# Altium PCB Tostado.PcbDoc
Units mm, origin at the board's own origin, x right, y up, seen from the top; angles counter-clockwise.
Board outline 69.09 x 53.85 mm, 4 copper layers (Top Layer, GND, PWR, Bottom Layer), stack 1.56 mm thick; 33 components, 45 nets, 178 pads, 219 vias.
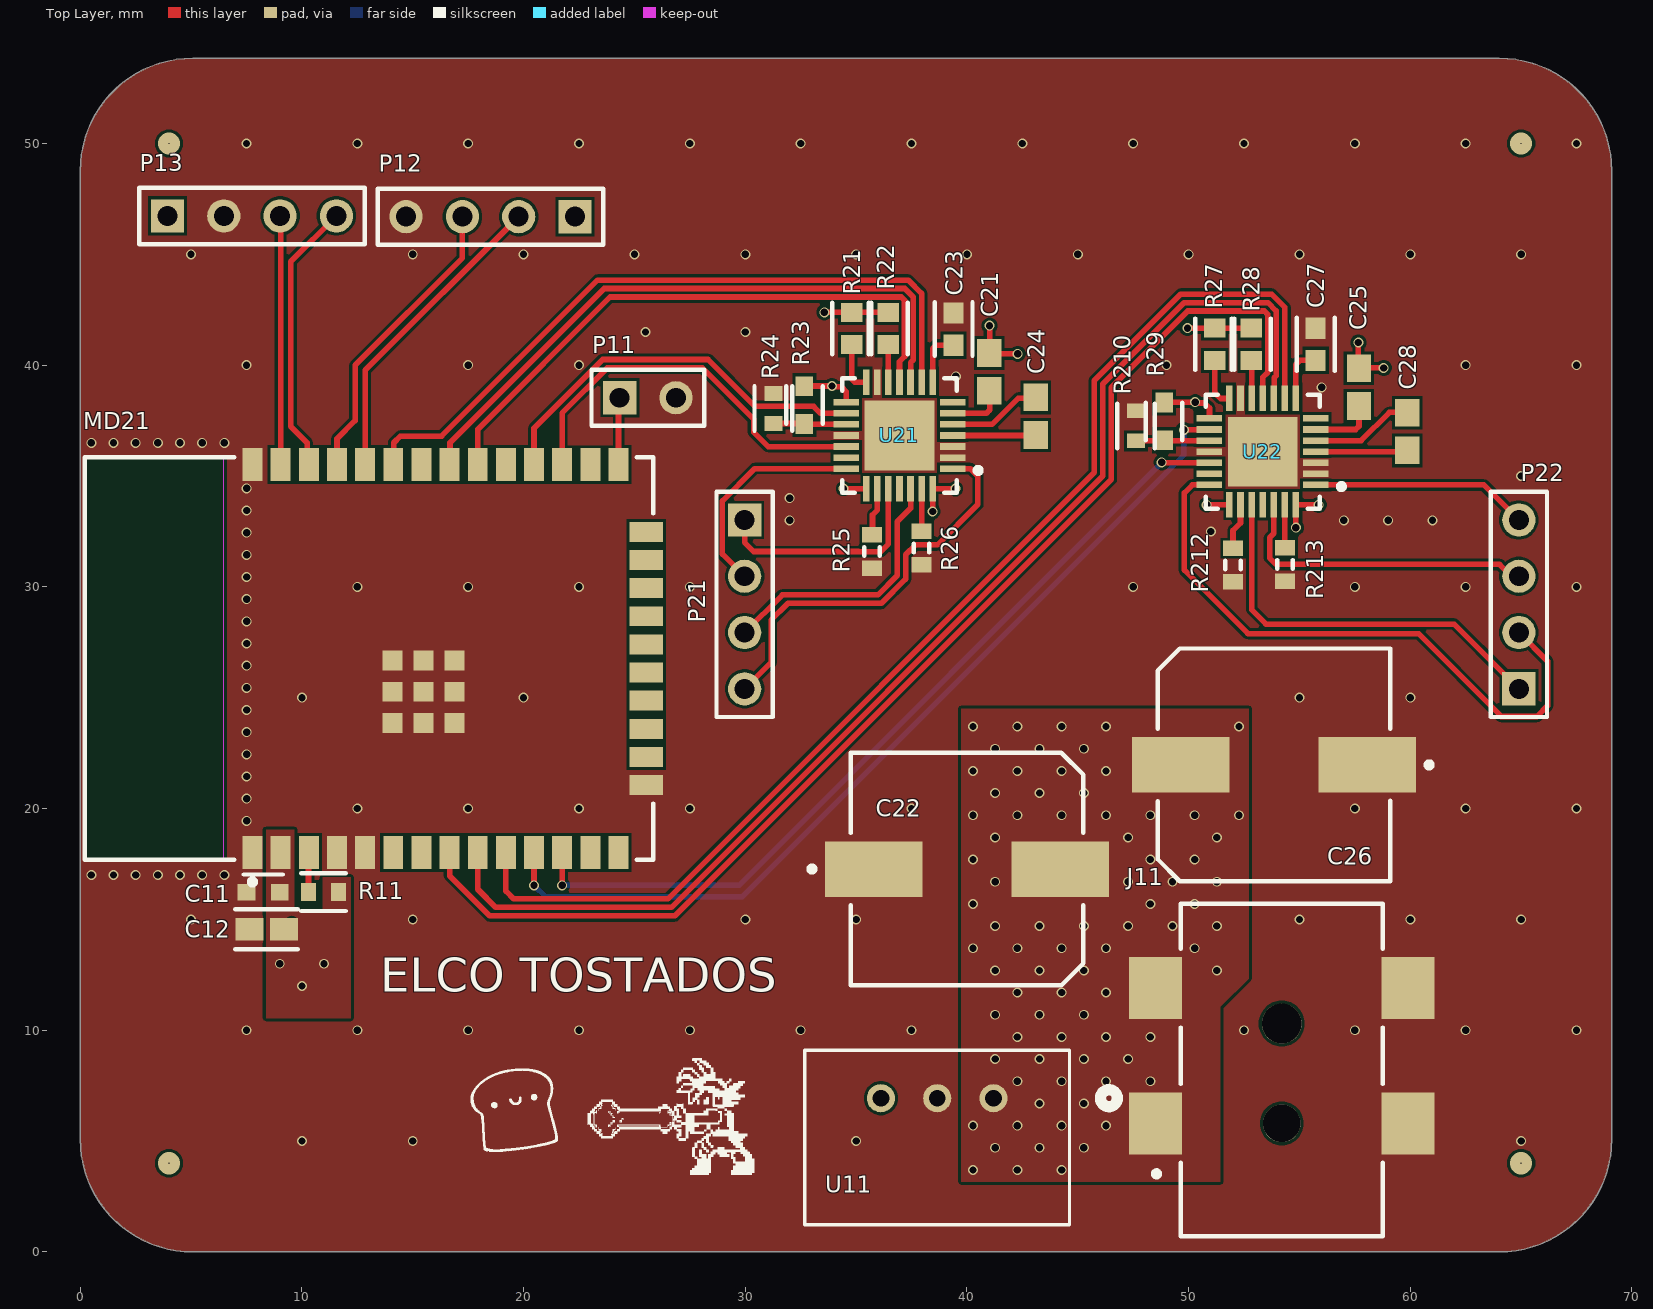
[diagram p0: Top Layer view]
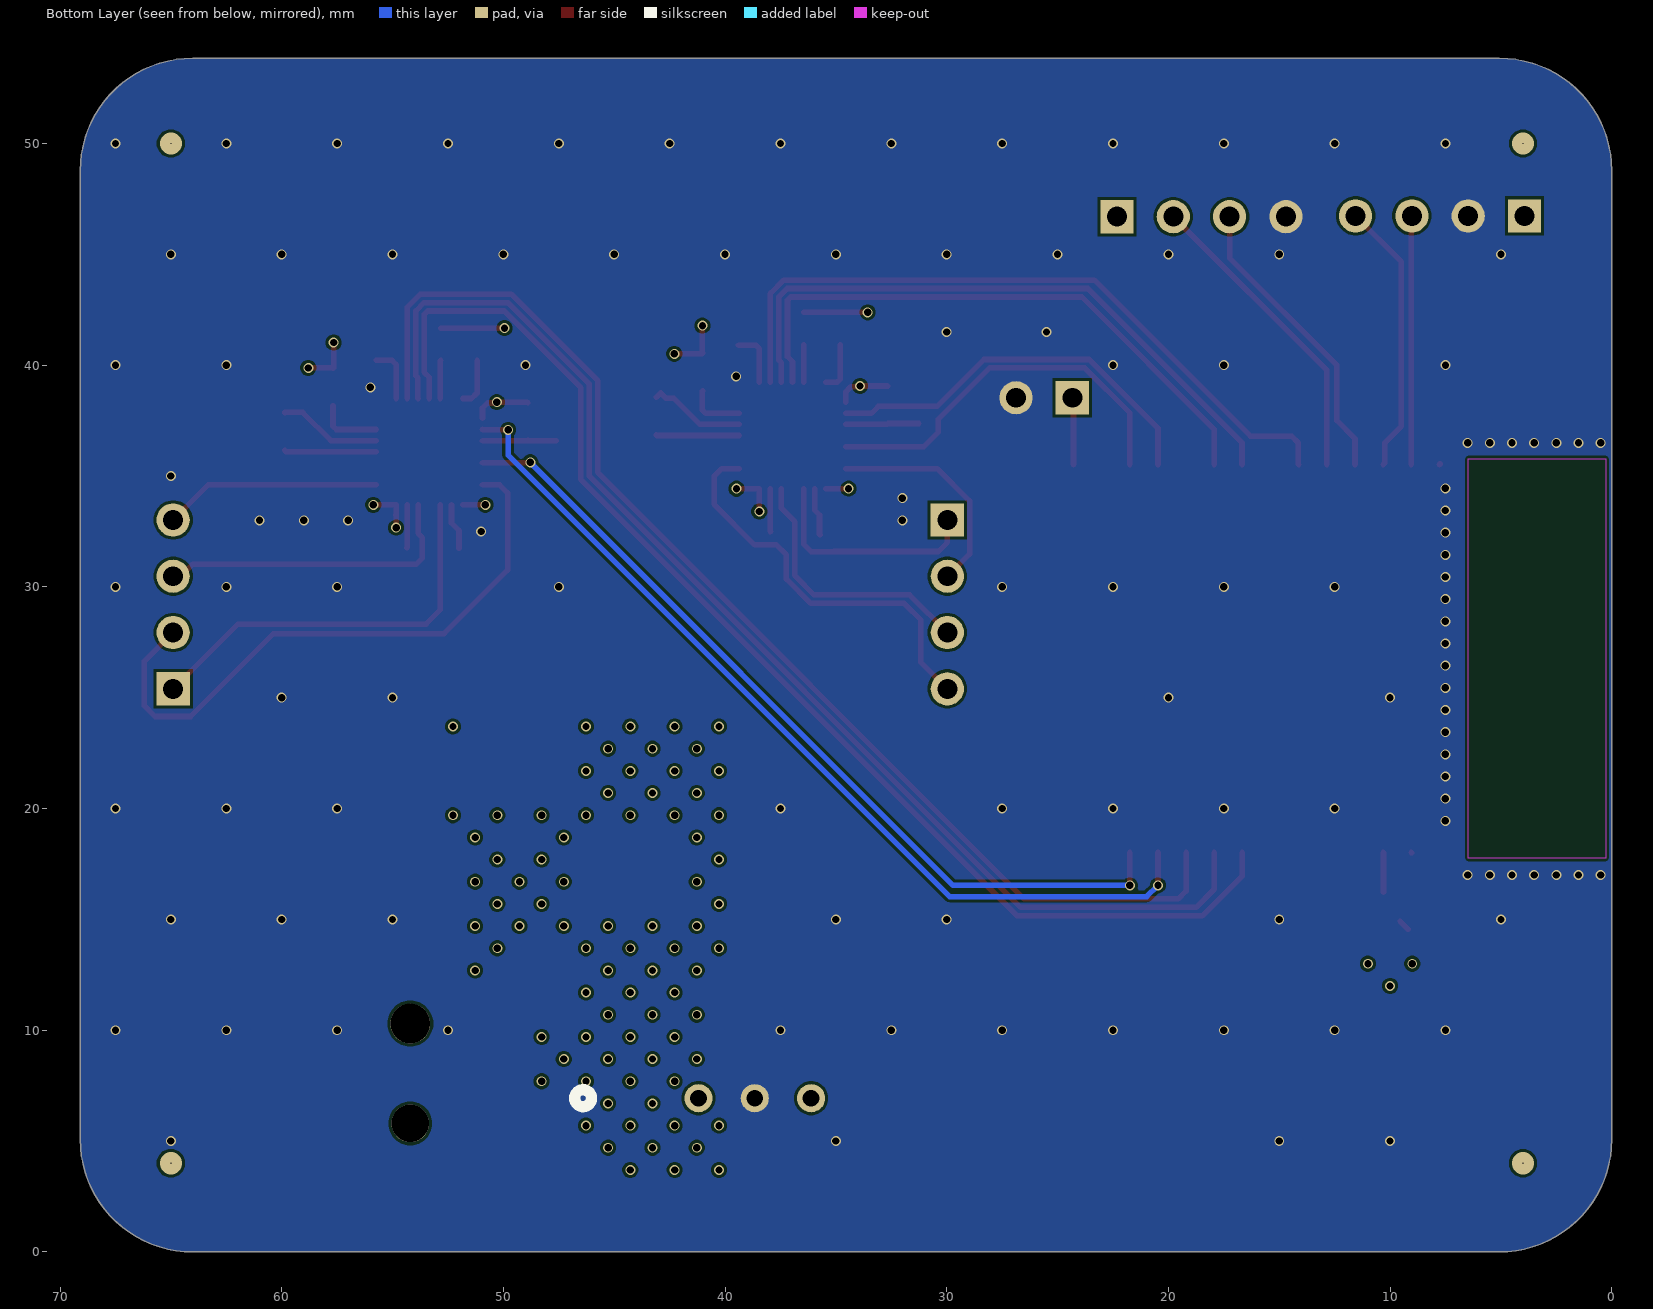
[diagram p1: Bottom Layer view, seen from below]
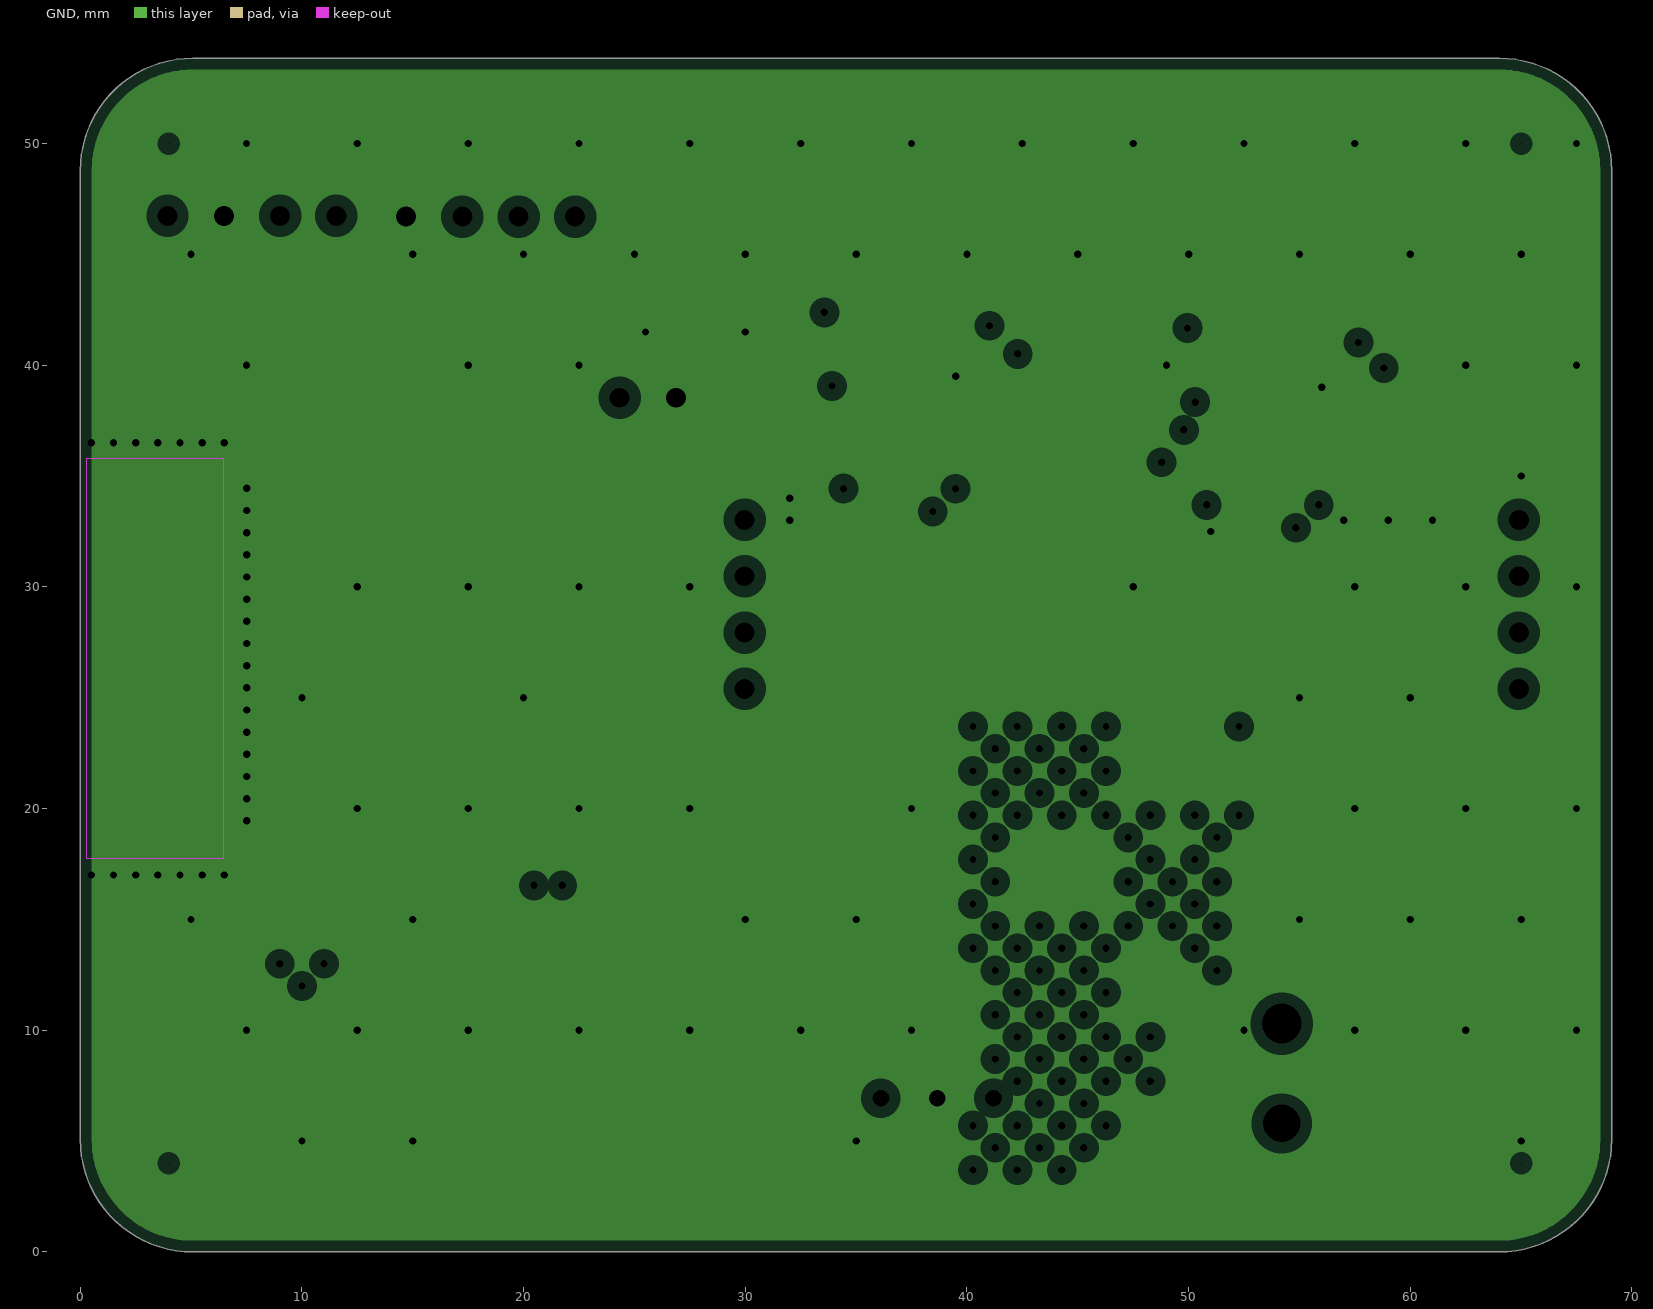
[diagram p2: GND, clearances drawn from the general rule]
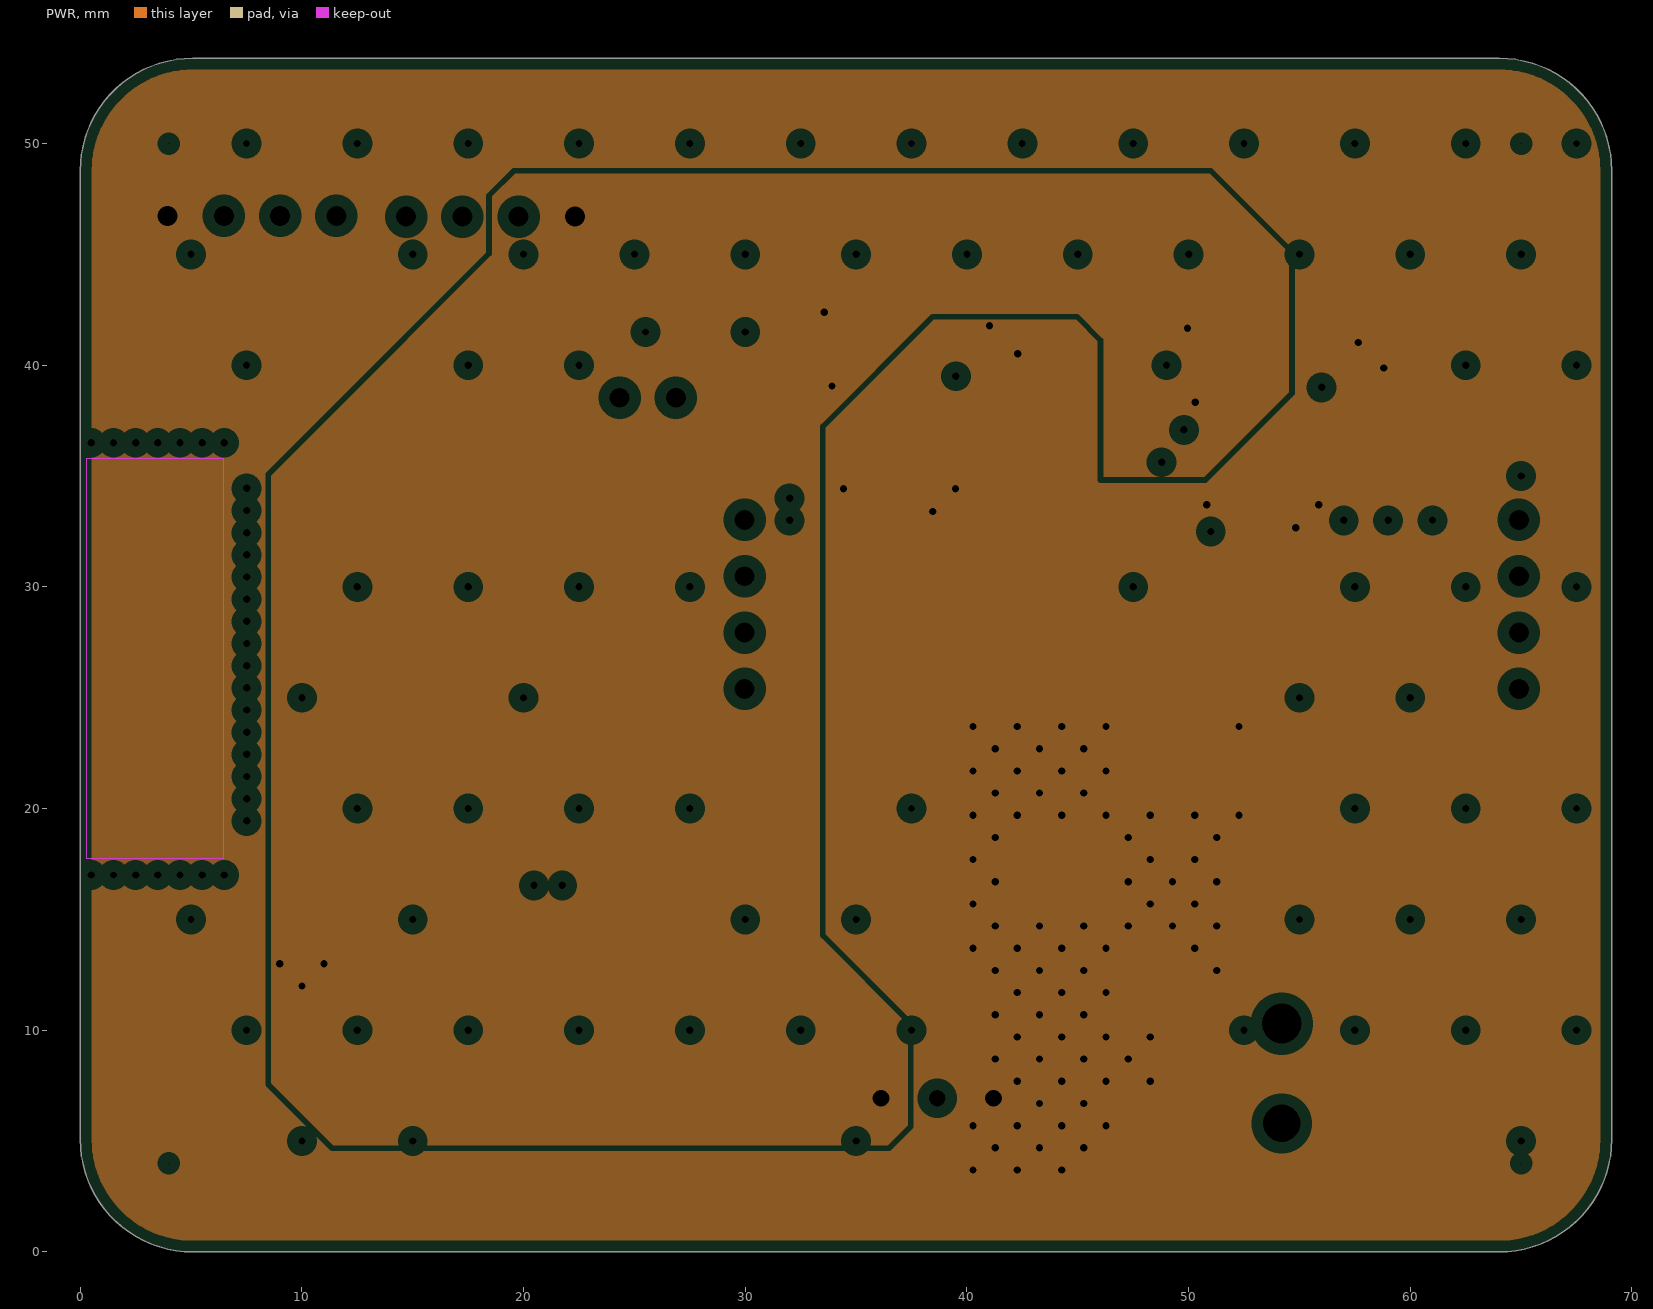
[diagram p3: PWR, clearances drawn from the general rule]
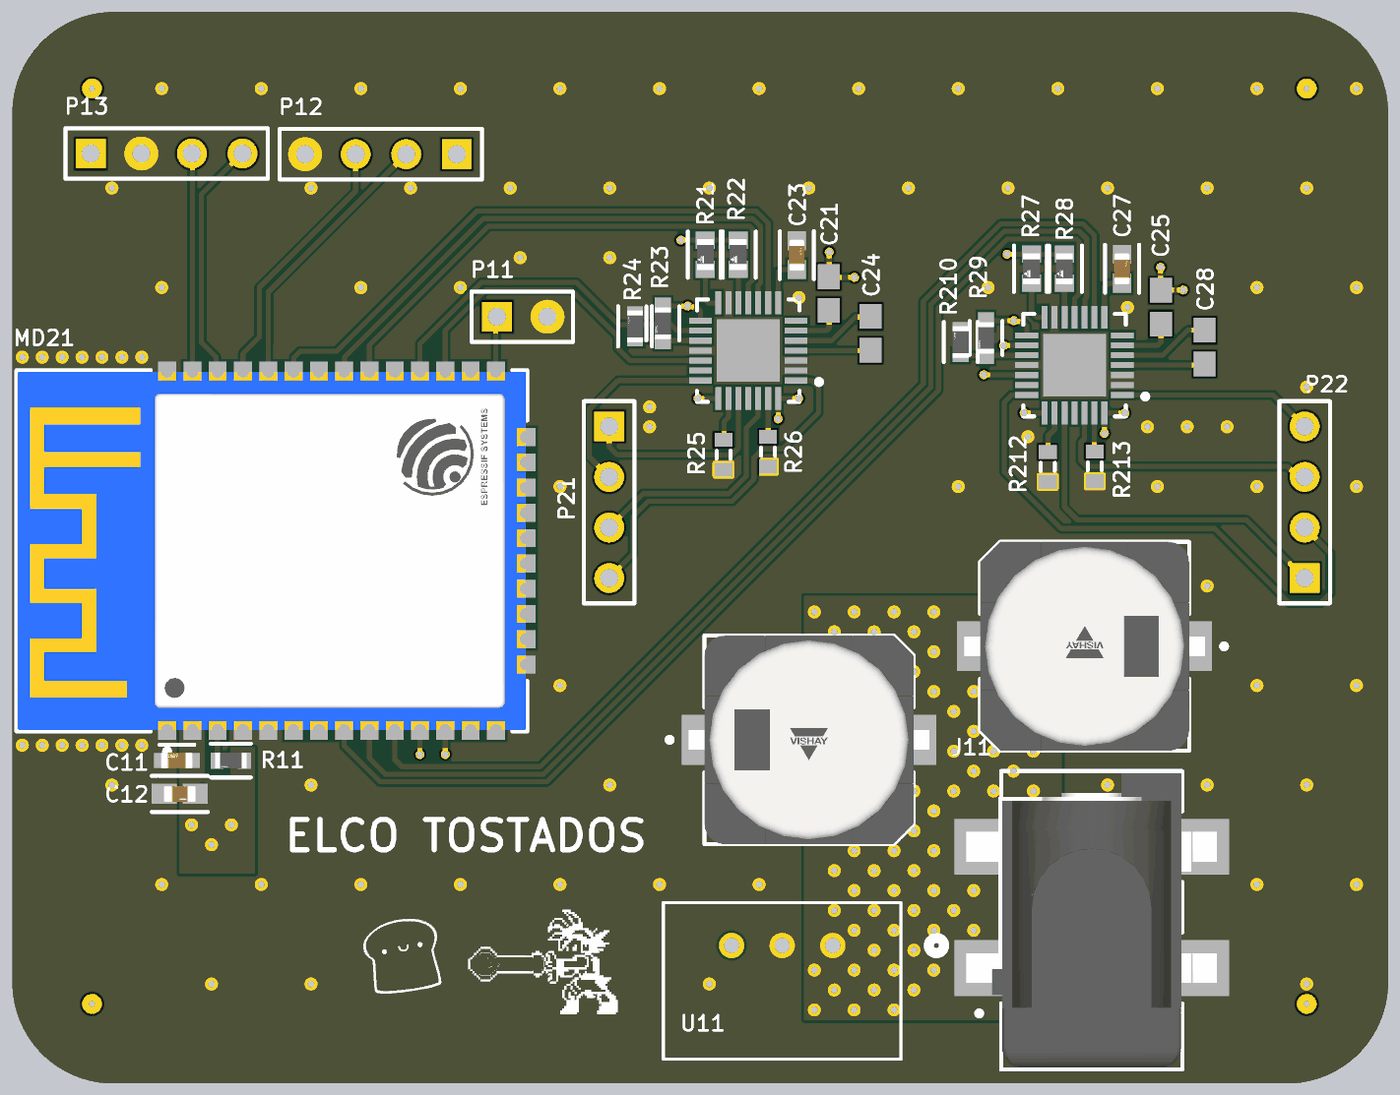
[diagram p4: 3D render of the assembled board from above, using the file's embedded part models]

## Layer stack, top to bottom
Top Solder: solder mask 0.0102, Solder Resist, Dk 3.5
Top Layer: signal copper 0.035
Dielectric 2: prepreg 0.11, PP-006, Dk 4.1
GND: plane copper 0.035, net GND
Core: core 1.2, FR-4, Dk 4.1
PWR: plane copper 0.035, net (Multiple Nets)
Dielectric 3: prepreg 0.11, PP-006, Dk 4.1
Bottom Layer: signal copper 0.035
Bottom Solder: solder mask 0.0102, Solder Resist, Dk 3.5

## Board outline
5.08,0 cw(c5.08,5.08) 0,5.08 0,48.768 cw(c5.08,48.768) 5.08,53.848 64.008,53.848 cw(c64.008,48.768) 69.088,48.768 69.088,5.08 cw(c64.008,5.08) 64.008,0

## Design rules (kind name [scope] priority, off if disabled: settings)
Clearance [All] p1: gap=0.127 ignorepadtopadclearanceinfootprint=FALSE except(0: Arc-Hole Track-Hole SMDPad-Hole THPad-Hole Via-Hole Fill-Hole Poly-Hole Region-Hole Text-Hole)
MinimumSolderMaskSliver [All] p1: minsoldermaskwidth=0.203
PlaneClearance [All] p1: clearance=0.508
PlaneConnect [All] p1: planeconnectstyle=Direct reliefexpansion=0.508 reliefentries=4 reliefconductorwidth=0.254 reliefairgap=0.254
PolygonConnect [All] p1: connectstyle=Direct reliefconductorwidth=0.254 reliefentries=4 polygonreliefangle="90 Angle" airgapwidth=0.254
RoutingVias [All] p1: holewidth=0.711 width=1.27 viastyle="Through Hole" minholewidth=0.711 minwidth=1.27 maxholewidth=0.711 maxwidth=1.27
SolderMaskExpansion [All] p1: expansion=0.102 istentingtop=FALSE
Width [All] p1: maxlimit=0.254 minlimit=0.254 preferedwidth=0.254
27 further rules are at their usual default settings.

## Classes and differential pairs
component class STEPPERS: C21 C22 C23 C24 C25 C26 C27 C28 P21 P22 R21 R22 R23 R24 R25 R26 R27 R28 R29 R210 R212 R213 U21 U22
component class "Arduino headers": C11 C12 J11 MD21 P11 P12 P13 R11 U11

## Components (designator, comment, footprint, x,y, rotation, side; value= is the part's Value field where it differs from the comment)
C11 "22uF" FP-0603-L_1_6_0_15-W_0_81-MFG 8.255,16.231 r180 top
C12 "0.1uF" FP-CC0603-DA-IPC_A 8.407,14.554 r180 top value=100nF
C21 "0.1uF" CAPC1608X90X35ML15T15 41,39.7 r90 top value=100nF
C22 "100uF" FP-MAL2150-1010-MFG 40.005,17.272 r0 top
C23 "0.22uF" FP-GCM188-0_1-IPC_B 39.395,41.631 r90 top value=220nF
C24 "0.1uF" CAPC1608X90X35ML15T15 43.1,37.7 r270 top value=100nF
C25 "0.1uF" CAPC1608X90X35ML15T15 57.683,39.014 r90 top value=100nF
C26 "100uF" FP-MAL2150-1010-MFG 53.848,21.971 r180 top
C27 "0.22uF" FP-GCM188-0_1-IPC_B 55.728,40.945 r90 top value=220nF
C28 "0.1uF" CAPC1608X90X35ML15T15 59.868,37.008 r270 top value=100nF
J11 "PJ-002BH-SMT-TR" FP-PJ-002BH-SMT-TR-MFG 54.2,8.2 r90 top
MD21 "ESP32-WROOM-32E (16MB)" FP-ESP32-WROOM-32E_16MB-MFG 13.031,26.77 r90 top
P11 "Jumper 1" HDR1X2 24.333,38.532 r0 top
P12 "UART" HDR1X4 22.32,46.7 r180 top
P13 "Laser" HDR1X4 3.937,46.736 r0 top
P21 "Motor 1" HDR1X4 29.972,33.02 r270 top
P22 "Motor 2" HDR1X4 64.897,25.4 r90 top
R11 "10k" FP-RC0603-0_55-IPC_C 10.973,16.231 r180 top value=10kR
R21 "4.7k" FP-MCT0603-IPC_B 34.798,41.656 r270 top value=4.7kR
R22 "4.7k" FP-MCT0603-IPC_B 36.449,41.656 r270 top value=4.7kR
R23 "10k" FP-AC0603-MFG 32.664,38.202 r270 top value=10kR
R24 "1k" FP-RC0603-0_55-IPC_C 31.267,38.049 r90 top value=1kR
R25 "Res3" J1-0603 35.712,31.598 r90 top value=0.1
R26 "Res3" J1-0603 37.948,31.75 r90 top value=0.1
R27 "4.7k" FP-MCT0603-IPC_B 51.181,40.945 r270 top value=4.7kR
R28 "4.7k" FP-MCT0603-IPC_B 52.832,40.945 r270 top value=4.7kR
R29 "10k" FP-AC0603-MFG 48.895,37.465 r270 top value=10kR
R210 "1k" FP-RC0603-0_55-IPC_C 47.625,37.262 r90 top value=1kR
R212 "Res3" J1-0603 51.994,30.988 r90 top value=0.1
R213 "Res3" J1-0603 54.356,31.013 r90 top value=0.1
U11 "TSR 1-2433" TSR1-SINGLE_TRP 41.199,6.934 r180 top
U21 "A4988SETTR-T" FP-ET-28-MFG 36.957,36.83 r180 top
U22 "A4988SETTR-T" FP-ET-28-MFG 53.34,36.1 r180 top

## Footprints (in the part's own frame and the unit in brackets; to place one, negate y for a bottom-side part, rotate by r counter-clockwise, add the part's x,y. Pads: shape width x height; smd on the part's side, far side on the other; paste and mask are expansions set on the pad)
CAPC1608X90X35ML15T15 [mm] "Chip Capacitor, 2-Leads, Body 1.60x0.81mm, IPC Low Density"
  rect 1.25x1.1 smd: 1(-0.85,0) 2(0.85,0)
  body extent -0.88,-0.48 0.87,0.48, height 0.9
FP-0603-L_1_6_0_15-W_0_81-MFG [mm]
  rect 0.8x0.75 smd paste+0 mask+0: 1(-0.75,0) 2(0.75,0)
  silkscreen extent -0.88,-0.79 0.87,0.77, body extent -1.25,-0.58 1.25,0.58, height 0.25
FP-AC0603-MFG [mm]
  rect 0.9x0.8 smd paste+0 mask+0: 1(-0.85,0) 2(0.85,0)
  silkscreen extent -0.85,-0.82 0.85,0.82, body extent -1.4,-0.55 1.4,0.55, height 0.25
FP-CC0603-DA-IPC_A [mm]
  rect 1.258x1.012 smd paste+0 mask+0: 1(-0.777,0) 2(0.777,0)
  silkscreen extent -1.41,-0.91 1.41,0.91, body extent -1.91,-1.01 1.91,1.01, height 0.25
FP-ESP32-WROOM-32E_16MB-MFG [mm]
  rect 1.5x0.9 smd paste+0 mask+0: 1(-8.75,5.26) 2(-8.75,3.99) 3(-8.75,2.72) 4(-8.75,1.45) 5(-8.75,0.18) 6(-8.75,-1.09) 7(-8.75,-2.36) 8(-8.75,-3.63) 9(-8.75,-4.9) 10(-8.75,-6.17) 11(-8.75,-7.44) 12(-8.75,-8.71) 13(-8.75,-9.98) 14(-8.75,-11.25) 25(8.75,-11.25) 26(8.75,-9.98) 27(8.75,-8.71) 28(8.75,-7.44) 29(8.75,-6.17) 30(8.75,-4.9) 31(8.75,-3.63) 32(8.75,-2.36) 33(8.75,-1.09) 34(8.75,0.18) 35(8.75,1.45) 36(8.75,2.72) 37(8.75,3.99) 38(8.75,5.26)
  rect 0.9x1.5 smd paste+0 mask+0: 15(-5.715,-12.5) 16(-4.445,-12.5) 17(-3.175,-12.5) 18(-1.905,-12.5) 19(-0.635,-12.5) 20(0.635,-12.5) 21(1.905,-12.5) 22(3.175,-12.5) 23(4.445,-12.5) 24(5.715,-12.5)
  rect 0.9x0.9 smd paste+0 mask+0: 39(-2.9,-2.46) 39(-2.9,-1.06) 39(-2.9,-3.86) 39(-1.5,-1.06) 39(-1.5,-3.86) 39(-1.5,-2.46) 39(-0.1,-1.06) 39(-0.1,-2.46) 39(-0.1,-3.86)
  Keep-Out Layer region: -9,6.559 9,6.559 9,12.749 -9,12.749
  silkscreen extent -10.2,-12.83 9.08,12.83, body extent -9.6,-13.35 9.6,12.93, height 0.25
FP-ET-28-MFG [mm]
  rect 1.15x0.3 smd paste+0 mask+0: 1(-2.4,1.5) 2(-2.4,1) 3(-2.4,0.5) 4(-2.4,0) 5(-2.4,-0.5) 6(-2.4,-1) 7(-2.4,-1.5) 15(2.4,-1.5) 16(2.4,-1) 17(2.4,-0.5) 18(2.4,0) 19(2.4,0.5) 20(2.4,1) 21(2.4,1.5)
  rect 0.3x1.15 smd paste+0 mask+0: 8(-1.5,-2.4) 9(-1,-2.4) 10(-0.5,-2.4) 11(0,-2.4) 12(0.5,-2.4) 13(1,-2.4) 14(1.5,-2.4) 22(1.5,2.4) 23(1,2.4) 24(0.5,2.4) 25(0,2.4) 26(-0.5,2.4) 27(-1,2.4) 28(-1.5,2.4)
  rect 3.15x3.15 smd paste+0 mask+0: 29(0,0)
  silkscreen extent -3.68,-2.58 2.58,2.57
FP-GCM188-0_1-IPC_B [mm]
  rect 0.959x0.912 smd paste+0 mask+0: 1(-0.727,0) 2(0.727,0)
  silkscreen extent -1.21,-0.86 1.21,0.86, body extent -1.46,-0.71 1.46,0.71, height 0.25
FP-MAL2150-1010-MFG [mm]
  rect 4.4x2.5 smd paste+0 mask+0: 1(-4.2,0) 2(4.2,0)
  silkscreen extent -7.12,-5.25 5.25,5.25, body extent -6.65,-5.5 6.65,5.5, height 0.25
FP-MCT0603-IPC_B [mm]
  rect 0.864x0.962 smd paste+0 mask+0: 1(-0.729,0) 2(0.729,0)
  silkscreen extent -1.16,-0.88 1.16,0.88, body extent -1.41,-0.73 1.41,0.73, height 0.25
FP-PJ-002BH-SMT-TR-MFG [mm]
  rect 2.8x2.4 smd paste+0 mask+0: 1(-2.4,5.7) 1(3.7,5.7) 2(-2.4,-5.7) 3(3.7,-5.7)
  round 1.7 hole 1.7 unplated paste-1000 mask+0: ""(-2.4,0)
  round 1.8 hole 1.8 unplated paste-1000 mask+0: ""(2.1,0)
  silkscreen extent -7.5,-4.55 7.5,5.77, body extent -7.6,-7 7.6,7, height 0.25
FP-RC0603-0_55-IPC_C [mm]
  rect 0.659x0.812 smd paste+0 mask+0: 1(-0.677,0) 2(0.677,0)
  silkscreen extent -1.01,-0.85 1.01,0.85, body extent -1.11,-0.55 1.11,0.55, height 0.25
HDR1X2 [mm] "Connector; Header; 2 Position"
  rect 1.5x1.5 hole 0.9: 1(0,0)
  round 1.5 hole 0.9: 2(2.54,0)
  silkscreen extent -1.27,-1.27 3.81,1.27
HDR1X4 [mm] "Connector; Header; 4 Position"
  rect 1.5x1.5 hole 0.9: 1(0,0)
  round 1.5 hole 0.9: 2(2.54,0) 3(5.08,0) 4(7.62,0)
  silkscreen extent -1.27,-1.27 8.89,1.27
J1-0603 [mm] "Chip Resistor, Body 1.6x0.8mm, IPC High Density"
  rect 0.7x0.9 smd: 1(-0.75,0) 2(0.75,0)
  silkscreen extent -0.2,-0.35 0.2,0.35, body extent -0.85,-0.48 0.85,0.48, height 0.9
TSR1-SINGLE_TRP [mil]
  round 50 / inner round 60 / far side round 50 hole 30 paste-25 mask+0: 1(0,0) 2(100,0) 3(200,0)
  silkscreen extent -220,-85 335,225

## Part data
C11: library part CMP-04427-003008-1, "General Purpose Ceramic Capacitor, 0603, 22uF, 20%, X5R, 15%, 10V", Case/Package=0603, Dielectric=X5R, Manufacturer="Kyocera AVX", Manufacturer Part Number=0603ZD226MAT2A, Supplier Part Number=581-0603ZD226MAT2A, Tolerance=20%, Voltage Rating (DC)=10V, Capacitance=22uF, Category="Ceramic Capacitors", Pricing="1=0,58, 10=0,311, 50=0,311, 100=0,2, 1000=0,169, 10000=0,138 (USD)", RoHS=Yes, RoHS Compliant=Yes, Stock=77, Supplier=Mouser
C12: library part CMP-03422-001490-1, "CAP CER 0.1UF 50V X7R 0603", Capacitance=100nF, Case Code (Imperial)=0603, Case Code (Metric)=1608, Dielectric=X7R, Manufacturer=Yageo, Manufacturer Part Number=CC0603JRX7R9BB104, Max Operating Temperature=125°C, Min Operating Temperature=-55°C, Resistor Type=Ceramic, Supplier Part Number=603-CC603JRX7R9BB104, Tolerance=5%, Voltage Rating=50V, Case/Package=0603, Category="Ceramic Capacitors", ComponentLink1Description=https://datasheet.ciiva.com/11465/upy-gphc-x7r-6-3v-to-50v-8-11465038.pdf?src-supplier=Avnet, ComponentLink1URL=https://datasheet.ciiva.com/11465/upy-gphc-x7r-6-3v-to-50v-8-11465038.pdf?src-supplier=Avnet, Construction=Flat, Depth=0.8mm, Halogen Free="Halogen Free", Height=0.8mm, Lead Free="Lead Free", Length=1.6mm, Mount="Surface Mount", Mounting Technology="Surface Mount", Number of Pins=2, Packaging="Tape and Reel", Pins=2, Pricing="1=0,1, 10=0,04, 50=0,04, 100=0,024, 1000=0,018, 10000=0,009 (USD)", Radiation Hardening=No, RoHS=Yes, RoHS Compliant=Yes, Series=CC, Stock=7435233, Supplier=Mouser, Termination=SMD/SMT, Thickness=0.035inch, Voltage Rating (DC)=50V, Weight=7.1E-05oz, Width=0.031inch
C21 C24 C25 C28: library part CMP-2006-02075-1, Case Code (Imperial)=0603, Case Code (Metric)=1608, Dielectric=X7R, Manufacturer="AVX Interconnect / Elco", Manufacturer Part Number=06033C104KAT4A, Max Operating Temperature=125°C, Min Operating Temperature=-55°C, Supplier Part Number=478-7018-1-ND, Tolerance=10%, Voltage Rating=25V, Case/Package=0603, Category="Ceramic Capacitors", ComponentLink1Description=https://datasheet.ciiva.com/22619/1679506-22619862.pdf?src-supplier=Element14, ComponentLink1URL=https://datasheet.ciiva.com/22619/1679506-22619862.pdf?src-supplier=Element14, ComponentLink2Description=https://datasheet.ciiva.com/28613/1679506-28613035.pdf?src-supplier=Element14, ComponentLink2URL=https://datasheet.ciiva.com/28613/1679506-28613035.pdf?src-supplier=Element14, ComponentLink3Description=https://datasheet.ciiva.com/6277/cx7r-6277758.pdf?src-supplier=Digi-Key, ComponentLink3URL=https://datasheet.ciiva.com/6277/cx7r-6277758.pdf?src-supplier=Digi-Key, ComponentLink4Description=https://datasheet.ciiva.com/6277/cx7r-6277759.pdf?src-supplier=Digi-Key, ComponentLink4URL=https://datasheet.ciiva.com/6277/cx7r-6277759.pdf?src-supplier=Digi-Key, Depth=0.81mm, Lead Free="Lead Free", Length=1.6mm, Mounting Technology="Surface Mount", Packaging="Cut Tape", Part Number=06033C104KAT4A, Pins=2, Pricing="1=0,1, 10=0,039, 50=0,0212, 100=0,0173, 500=0,01238, 1000=0,00972, 2500=0,00884, 5000=0,00813 (USD)", Reach SVHC Compliant=No, RoHS=Yes, RoHS Compliant=Yes, Series=-, Stock=1374924, Supplier=Digi-Key
C22 C26: library part CMP-02412-000026-1, "CAP ALUM 100UF 20% 50V SMD", Case/Package=Radial, Dielectric Material=Aluminium, ESR (Equivalent Series Resistance)=240mR, Manufacturer="Vishay BCcomponents", Manufacturer Part Number=MAL215097101E3, Max Operating Temperature=105°C, Min Operating Temperature=-55°C, Package Quantity=500, Ripple Current=490mA, Supplier Part Number=BC5165CT-ND, Tolerance=20%, Voltage Rating=50V, Capacitance=100uF, Category="Aluminum Electrolytic Capacitors", ComponentLink1Description=https://datasheet.ciiva.com/22698/1839053-22698438.pdf?src-supplier=Element14, ComponentLink1URL=https://datasheet.ciiva.com/22698/1839053-22698438.pdf?src-supplier=Element14, ComponentLink2Description=https://datasheet.ciiva.com/1455/1839053-1455747.pdf?src-supplier=Element14, ComponentLink2URL=https://datasheet.ciiva.com/1455/1839053-1455747.pdf?src-supplier=Element14, Construction=Cylindrical, Diameter=10mm, Dissipation Factor=0.12%, Height=10mm, Impedance=240mR, Length=10mm, Life (Hours)=3000Hour, Packaging="Tape and Reel", Pricing="1=2,21, 10=1,787, 50=1,5594, 100=1,3645 (USD)", Radiation Hardening=No, Reach SVHC Compliant=Unknown, Ripple Current (AC)=490mA, RoHS=Yes, RoHS Compliant=Yes, Series="Automotive, AEC-Q200, 150 CRZ", Stock=6366, Supplier=Digi-Key, Termination=SMD/SMT, Voltage Rating (DC)=50V, Width=10mm
C23 C27: library part CMP-06035-005079-1, "Ceramic Capacitor for Automotive 220nF  ±10% 25VDC X7R 0603 Paper T/R", Capacitance=220nF, Case Code (Imperial)=0603, Case Code (Metric)=1608, Dielectric=X7R, Manufacturer=Murata, Manufacturer Part Number=GCM188R71E224KA55J, Max Operating Temperature=125°C, Min Operating Temperature=-55°C, Package Quantity=10000, Ratings=AEC-Q200, Supplier Part Number=490-8017-1-ND, Tolerance=10%, Voltage Rating=25V, Case/Package=0603, Category="Ceramic Capacitors", ComponentLink1Description=https://datasheet.ciiva.com/29541/product-29541560.pdf?src-supplier=Digi-Key, ComponentLink1URL=https://datasheet.ciiva.com/29541/product-29541560.pdf?src-supplier=Digi-Key, ComponentLink2Description=https://datasheet.ciiva.com/11619/product-11619017.pdf?src-supplier=Avnet, ComponentLink2URL=https://datasheet.ciiva.com/11619/product-11619017.pdf?src-supplier=Avnet, ComponentLink3Description=https://datasheet.ciiva.com/29541/product-29541578.pdf?src-supplier=Digi-Key, ComponentLink3URL=https://datasheet.ciiva.com/29541/product-29541578.pdf?src-supplier=Digi-Key, ComponentLink4Description=https://datasheet.ciiva.com/29541/product-29541579.pdf?src-supplier=Digi-Key, ComponentLink4URL=https://datasheet.ciiva.com/29541/product-29541579.pdf?src-supplier=Digi-Key, Construction=Flat, Depth=0.8mm, Height=0.8mm, Lead Free="Lead Free", Length=1.6mm, Mount="Surface Mount", Mounting Technology="Surface Mount", Packaging="Tape and Reel", Pricing="1=0,11, 10=0,08, 50=0,0436, 100=0,0356, 500=0,02546, 1000=0,02, 2500=0,01818, 5000=0,01673 (USD)", Radiation Hardening=No, RoHS=Yes, RoHS Compliant=Yes, Series=GCM, Stock=516546, Supplier=Digi-Key, Termination=SMD/SMT, Thickness=0.035inch, Voltage Rating (DC)=25V, Width=0.8mm
J11: library part CMP-2000-06897-2, "CONN PWR JACK 2.5X5.5MM SOLDER", Current Rating=5A, Manufacturer="CUI Inc", Package=0, Temperature="-25°C to +85°C", Temperature Range High=+85°C, Temperature Range Low=-25°C, Voltage Rating=24V, Automotive=No, Category=Conn, ComponentLink2Description=Datasheet, ComponentLink2URL=https://www.cuidevices.com/product/resource/digikeypdf/pj-002bh-smt-tr.pdf, Conn Gender=Male, Conn Orientation="Right Angle", Contact Material=Nickel,Silver, Device Class L1=Connectors, Device Class L2="Power Connectors", Device Class L3=unset, Digikey Description="CONN PWR JACK 2.5X5.5MM SOLDER", Height=11.43mm, Lead Free=Yes, Manufacturer Part Number=PJ-002BH-SMT-TR, Mouser Description="2.5 mm Center Pin, 5.0 A, Right Angle, Surface Mount (SMT), Dc Power Jack Connector", Number Of Contacts=3, Octopart=https://octopart.com/pj-002bh-smt-tr-cui-25947151, RoHS=TRUE, Standoff Height=0.1mm
MD21: library part CMP-194065-000027-1, "RX TXRX MOD WIFI TRACE ANT SMD"
P11: library part "Header 2", "Header, 2-Pin", LatestRevisionDate=17-Jul-2002, LatestRevisionNote="Re-released for DXP Platform.", Publisher="Altium Limited"
P12 P13 P21 P22: library part "Header 4", "Header, 4-Pin", LatestRevisionDate=17-Jul-2002, LatestRevisionNote="Re-released for DXP Platform.", Publisher="Altium Limited"
R11: library part CMP-2100-03664-2, "RES 10K OHM 1% 1/10W 0603", Case Code (Imperial)=0603, Case Code (Metric)=1608, Manufacturer=Yageo, Manufacturer Part Number=RC0603FR-0710KL, Max Operating Temperature=155°C, Max Power Dissipation=100mW, Min Operating Temperature=-55°C, Resistance=10kR, Resistance Tolerance=1%, Resistor Type="Thick Film", Supplier Part Number=3349388, Temperature Coefficient=100ppm/°C, Voltage Rating=75V, Voltage Rating (DC)=50V, Case/Package=0603, Category="Chip SMD Resistors", Construction=Rectangular, Depth=0.8mm, Features="Moisture Resistant", Height=0.45mm, Lead Free="Lead Free", Lead Pitch=0.3mm, Length=1.6mm, Military Standard=Not, Number of Pins=2, Number of Terminations=2, Packaging="Tape and Reel", Pins=2, Power Rating=100mW, Pricing="1=0,1, 20=0,0661, 100=0,048, 500=0,0298, 2500=0,0116 (USD)", Reach SVHC Compliant=No, RoHS=Yes, RoHS Compliant=Yes, Series=RC, Size Code=0603, Stock=252943, Supplier="Future Electronics", Termination=SMD/SMT, Tolerance=1%, Weight=7.1E-05oz, Width=0.8mm
R21 R22 R27 R28: library part CMP-02407-000771-1, "RES SMD 100 OHM 1% 1/8W 0603", Case/Package=0603, Manufacturer="Vishay BCcomponents", Manufacturer Part Number=MCT0603MD4701BP500, Max Operating Temperature=155°C, Max Power Dissipation=125mW, Min Operating Temperature=-55°C, Resistance=4.7kR, Temperature Coefficient=25ppm/°C, Tolerance=0.1%, Category="Chip SMD Resistors", ComponentLink1Description=http://www.vishay.com/docs/28785/mcat_pre.pdf?src-supplier=Digi-Key, ComponentLink1URL=http://www.vishay.com/docs/28785/mcat_pre.pdf?src-supplier=Digi-Key, Composition="Thin Film", Features="Automotive AEC-Q200", Number of Terminations=2, Packaging="Tape and Reel", Pricing 1="1=0,65, 10=0,463, 50=0,463, 100=0,238, 1000=0,13, 10000=0,123 (USD)", RoHS=Yes, RoHS Compliant=Yes, Series="MCT AT - Precision", Stock 1=4730, Supplier 1=Mouser
R23 R29: library part CMP-2000-04818-3, "RES 10KΩ 1.00% 0.1W 0603", Case Code (Imperial)=0603, Case Code (Metric)=1608, Manufacturer=Yageo, Manufacturer Part Number=AC0603FR-0710KL, Max Operating Temperature=155°C, Max Power Dissipation=100mW, Min Operating Temperature=-55°C, Package Quantity=1, Ratings=AEC-Q200, Resistance=10kR, Resistor Type="Thick Film", Temperature Coefficient=100ppm/°C, Tolerance=1%, Voltage Rating=50V, Case/Package=0603, Category="Chip SMD Resistors", ComponentLink1Description=https://datasheet.ciiva.com/26862/getdatasheetpartid-724997-26862461.pdf?src-supplier=Verical, ComponentLink1URL=https://datasheet.ciiva.com/26862/getdatasheetpartid-724997-26862461.pdf?src-supplier=Verical, Construction=Rectangular, Depth=0.8mm, Features="Moisture Resistant", Height=0.45mm, Lead Free="Lead Free", Length=1.6mm, Military Standard=Not, Mount="Surface Mount", Mounting Technology="Surface Mount", Number of Terminations=2, Packaging="Tape and Reel", Power Rating=100mW, Pricing 1="1=0,1, 10=0,003, 50=0,003, 100=0,003, 1000=0,003, 10000=0,002 (USD)", RoHS=Yes, RoHS Compliant=Yes, Series=AC, Size Code=0603, Stock 1=1450617, Supplier 1=Mouser, Termination=SMD/SMT, Width=0.8mm
R24 R210: library part CMP-1659-00009-5, "RES 1K OHM 1% 1/10W 0603", Case Code (Imperial)=0603, Case Code (Metric)=1608, Manufacturer=Yageo, Manufacturer Part Number=RC0603FR-071KL, Max Operating Temperature=155°C, Max Power Dissipation=100mW, Min Operating Temperature=-55°C, Resistance=1kR, Resistance Tolerance=1%, Resistor Type="Thick Film", Temperature Coefficient=100ppm/°C, Voltage Rating=50V, Case/Package=0603, Category="Chip SMD Resistors", Construction=Rectangular, Contact Plating=Tin, Depth=0.8mm, Features="Moisture Resistant", Height=0.45mm, Lead Free="Lead Free", Length=1.6mm, Military Standard=Not, Number of Terminations=2, Packaging="Tape and Reel", Power Rating=100mW, Pricing 1="1=0,1, 10=0,019, 50=0,019, 100=0,007, 1000=0,004, 10000=0,002 (USD)", Radiation Hardening=No, REACH SVHC="No SVHC", Reach SVHC Compliant=No, RoHS=Yes, RoHS Compliant=Yes, Series=RC, Size Code=0603, Stock 1=9884296, Supplier 1=Mouser, Technology="THICK FILM", Termination=SMD/SMT, Tolerance=1%
R25 R26 R212 R213: "Thick Film Surface Mount Chip Resistor 0603 Size 0.1 Ohm 5% 0.1 W ±400 ppm/°C 2-Pin SMD T/R", Case/Package=0603, Manufacturer="Vishay Dale", Manufacturer Part Number=RCWL0603R100JQEA, Max Operating Temperature=155°C, Max Power Dissipation=100mW, Min Operating Temperature=-55°C, Temperature Coefficient=400ppm/°C, Tolerance=5%, Category="Chip SMD Resistors", ComponentLink1Description=http://www.vishay.com/docs/20018/rcwl.pdf?src-supplier=Digi-Key, ComponentLink1URL=http://www.vishay.com/docs/20018/rcwl.pdf?src-supplier=Digi-Key, Features="Moisture Resistant,Automotive AEC-Q200", Height=0.02inch, LatestRevisionDate=29-May-2009, LatestRevisionNote="IPC-7351 Footprint Added.", Length=0.061inch, Number of Terminations=2, PackageDescription="Chip Resistor", PackageReference=J1-0603, Packaging="Tape and Reel", Pricing 1="1=0,35, 10=0,303, 50=0,303, 100=0,119, 1000=0,05, 10000=0,038 (USD)", Published=8-Jun-2000, Publisher="Altium Limited", RoHS=Yes, RoHS Compliant=Yes, Series=RCWL, Stock 1=12117, Supplier 1=Mouser, Width=0.033inch
U11: library part CMP-2000-05426-2, Case/Package=SIP, Manufacturer="Traco Power", Manufacturer Part Number=TSR1-2433, Max Input Voltage=36V, Max Input Voltage (DC)=32V, Max Operating Temperature=85°C, Max Output Current=1A, Max Output Power=3.3W, Min Input Voltage=4.75V, Min Input Voltage (DC)=5.5V, Min Operating Temperature=-40°C, Nominal Output Voltage=3.3V, Nominal Supply Current=1mA, Supplier Part Number=495-TSR-1-2433, Switching Frequency=500kHz, Category=Uncategorized, ComponentLink1Description=https://datasheet.ciiva.com/26336/156671-da-01-en-dc-dc-wandler-1a-tsr-1-2433-26336397.pdf?src-supplier=Conrad, ComponentLink1URL=https://datasheet.ciiva.com/26336/156671-da-01-en-dc-dc-wandler-1a-tsr-1-2433-26336397.pdf?src-supplier=Conrad, ComponentLink2Description=https://datasheet.ciiva.com/3355/tsr1-eng-tds-3355819.pdf?src-supplier=Distrelec, ComponentLink2URL=https://datasheet.ciiva.com/3355/tsr1-eng-tds-3355819.pdf?src-supplier=Distrelec, Depth=7.6mm, Efficiency=79%, Features=SCP, Height=10.2mm, Isolation=Isolated, Length=11.7mm, Max Power Dissipation=3.3W, Max Supply Voltage=36V, Min Supply Voltage=4.75V, Mount="Through Hole", Mounting Technology="Through Hole", NexarPartId=9539342, Number Of Outputs=1, Number of Pins=3, Output Current=1A, Output Power=3.3W, Output Type=Fixed, Output Voltage=3.3V, Pins=3, Power Rating=3.3W, Pricing="1=6,15, 10=5,97, 50=5,61, 100=5,44, 1000=4,74, 10000=4,74 (USD)", Radiation Hardening=No, REACH SVHC="No SVHC", Reach SVHC Compliant=No, RoHS=Compliant, RoHS Compliant=Yes, Series="TSR 1", Stock=10749, Supplier=Mouser, Voltage - Output 1=3.3V, Weight=1.9g, Width=7.6mm
U21 U22: library part CMP-1742-00003-2, "IC MTR DRVR BIPOLAR 3-5.5V 28QFN", Case/Package="QFN EP", Manufacturer="Allegro MicroSystems", Max Operating Temperature=85°C, Max Supply Voltage=35V, Min Operating Temperature=-20°C, Min Supply Voltage=8V, Output Current=2A, Package Quantity=1, Supplier Part Number=620-1343-1-ND, Category="Motor Drivers", ComponentLink1Description=https://datasheet.ciiva.com/1147/1481258-1147170.pdf?src-supplier=Element14, ComponentLink1URL=https://datasheet.ciiva.com/1147/1481258-1147170.pdf?src-supplier=Element14, ComponentLink2Description=https://datasheet.ciiva.com/1608/a4988-datasheet-1608449.pdf?src-supplier=Newark, ComponentLink2URL=https://datasheet.ciiva.com/1608/a4988-datasheet-1608449.pdf?src-supplier=Newark, ComponentLink3Description=https://datasheet.ciiva.com/15109/getdatasheetpartid-557828-15109654.pdf?src-supplier=Verical, ComponentLink3URL=https://datasheet.ciiva.com/15109/getdatasheetpartid-557828-15109654.pdf?src-supplier=Verical, ComponentLink4Description=https://datasheet.ciiva.com/3229/a4988-datasheet-3229532.pdf?src-supplier=Avnet, ComponentLink4URL=https://datasheet.ciiva.com/3229/a4988-datasheet-3229532.pdf?src-supplier=Avnet, Interface=Logic, Manufacturer Part Number=A4988SETTR-T, Motor Type=Stepper, Mount="Surface Mount", Mounting Technology="Surface Mount", Number Of Outputs=1, Number of Pins=28, Output Voltage=35V, Packaging="Tape and Reel", Pins=28, Pricing="1=3,11, 10=2,795, 25=2,642, 100=2,2897, 250=2,17228, 500=1,94918 (USD)", Radiation Hardening=No, REACH SVHC="No SVHC", Reach SVHC Compliant=No, RoHS=Yes, RoHS Compliant=Yes, Series=-, Stock=345, Supplier=Digi-Key, Technology=DMOS

## Via types
v1: diameter 0.45, hole 0.33, Top Layer to Bottom Layer, 215 vias
v2: diameter 1, hole 0, Top Layer to Bottom Layer, 4 vias

## Nets (pads, with @x,y where several pads share a name; then routed paths per layer and width w, separated by ;. In a path a pad name is that pad's centre, name@x,y a point inside that pad or via, vN(x,y) a via of type N, cw(c..) or ccw(c..) an arc to the next point about the centre after c; other vN are vias at no path point)
3_MS22: MD21.9 U22.10 | length 55.9
  Top Layer w0.254: MD21.9 17.931,16.359 18.745,15.545 26.665,15.545 46.126,35.007 46.126,38.755 46.126,39.147 49.804,42.824 50.196,42.824 53.576,42.824 53.948,42.452 53.948,39.521 53.863,39.435 53.863,38.523 U22.10
3V3_PWR: C11.1 C12.1 MD21.2 P12.1 R11.1 R21.1 R22.1 R23.1 R27.1 R28.1 R29.1 U11.3 U21.15 U22.15 | length 11.3
  Top Layer w0.254: MD21.2@9.026,18.005 MD21.2 ; C12.1 C12.1@9.54,14.91 ; R23.1 32.678,39.065 v1(33.909,39.065) 33.947,39.028 34.328,39.028 34.557,38.798 U21.15 ; v1(33.567,42.385) R21.1 R22.1 ; R29.1 48.915,38.335 v1(50.292,38.335) ; v1(49.95,41.674) R27.1 R28.1 ; v1@50.33,38.298 50.711,38.298 50.94,38.068 U22.15
  other v1: 10,12 9,13 11,13
4_MS21: MD21.10 U22.9 | length 55.1
  Top Layer w0.254: MD21.10 19.201,16.283 19.558,15.926 26.507,15.926 45.745,35.164 45.745,38.913 45.745,39.305 49.646,43.205 50.038,43.205 53.746,43.205 54.34,42.612 U22.9
4_MS23: MD21.8 U22.11 | length 56.4
  Top Layer w0.254: MD21.8 16.661,16.969 18.466,15.164 26.822,15.164 46.507,34.849 46.507,38.989 49.962,42.443 53.418,42.443 53.567,42.295 53.567,39.678 53.34,39.451 U22.11
5_MS11: MD21.33 U21.9 | length 32.1
  Top Layer w0.254: MD21.33 14.144,35.543 14.144,36.502 14.442,36.8 16.3,36.8 23.34,43.84 37.351,43.84 37.957,43.234 U21.9
6_STEP2: MD21.11 U22.16 | length 41.6
  Top Layer w0.254: MD21.11 20.472,18.019 v1(20.472,16.535) ; v1(49.784,37.084) 49.792,37.092 50.932,37.092 U22.16
  Bottom Layer w0.254: v1(20.472,16.535) 20.98,16.027 29.867,16.027 49.784,35.944 v1(49.784,37.084)
7_MS12: MD21.31 U21.10 | length 28.8
  Top Layer w0.254: MD21.31 16.679,35.538 16.679,36.502 23.636,43.459 37.193,43.459 37.576,43.076 37.576,40.243 37.457,40.124 U21.10
8_MS13: MD21.30 U21.11 | length 27.2
  Top Layer w0.254: MD21.30 17.931,37.108 23.901,43.078 37.035,43.078 37.184,42.93 37.184,40.39 36.957,40.162 U21.11
9_STEP1: MD21.28 U21.16 | length 18
  Top Layer w0.254: MD21.28 20.471,37.159 23.571,40.259 28.321,40.259 30.437,38.143 33.083,38.143 33.395,37.83 U21.16
10_FAN: MD21.36 P13.4 | length 12.4
  Top Layer w0.254: MD21.36 10.234,35.597 10.234,36.502 9.498,37.238 9.498,44.677 P13.4
11_LASER: MD21.37 P13.3 | length 11.2
  Top Layer w0.254: P13.3 9.041,46.712 MD21.37
12_DIR2: MD21.12 U22.19 | length 38.6
  Top Layer w0.254: v1(21.741,16.537) MD21.12 ; v1(48.783,35.621) 48.799,35.605 50.935,35.605 U22.19
  Bottom Layer w0.254: v1(21.741,16.537) 29.719,16.537 48.783,35.601 v1(48.783,35.621)
12V_PWR: C21.2 C22.2 C25.2 C26.2 J11.1 P13.1 U11.1 U21.22 U21.28 U22.22 U22.28 | length 11.5
  Top Layer w0.254: v1@34.429,34.431 U21.22 ; v1(38.456,33.401) U21.28@38.456,34.429 ; U21.28 v1@39.485,34.429 ; C21.2@41.001,40.549 41.037,40.513 v1(42.291,40.513) ; C21.2 41.021,40.571 v1(41.021,41.783) ; v1@50.812,33.701 U22.22 ; v1(54.839,32.671) 54.839,33.699 54.84,33.275 U22.28@54.863,33.252 ; U22.28@54.841,33.699 v1@55.868,33.699 ; v1(57.658,41.021) 57.658,39.891 C25.2 ; C25.2@57.685,39.864 57.698,39.878 v1(58.801,39.878)
  other v1: 40.275,3.699 42.275,3.699 44.275,3.699 41.275,4.699 43.275,4.699 45.275,4.699 40.275,5.699 42.275,5.699 44.275,5.699 46.275,5.699 43.275,6.699 45.275,6.699 42.275,7.699 44.275,7.699 46.275,7.699 48.275,7.699 41.275,8.699 43.275,8.699 45.275,8.699 47.275,8.699 42.275,9.699 44.275,9.699 46.275,9.699 48.275,9.699 41.275,10.699 43.275,10.699 45.275,10.699 42.275,11.699 44.275,11.699 46.275,11.699 41.275,12.699 43.275,12.699 45.275,12.699 51.275,12.699 40.275,13.699 42.275,13.699 44.275,13.699 46.275,13.699 50.275,13.699 41.275,14.699 43.275,14.699 45.275,14.699 47.275,14.699 49.275,14.699 51.275,14.699 40.275,15.699 48.275,15.699 50.275,15.699 41.275,16.699 47.275,16.699 49.275,16.699 51.275,16.699 40.275,17.699 48.275,17.699 50.275,17.699 41.275,18.699 47.275,18.699 51.275,18.699 40.275,19.699 42.275,19.699 44.275,19.699 46.275,19.699 48.275,19.699 50.275,19.699 52.275,19.699 41.275,20.699 43.275,20.699 45.275,20.699 40.275,21.699 42.275,21.699 44.275,21.699 46.275,21.699 41.275,22.699 43.275,22.699 45.275,22.699 40.275,23.699 42.275,23.699 44.275,23.699 46.275,23.699 52.275,23.699 50.811,33.701 55.869,33.699 39.485,34.428 34.428,34.431
13_DIR1: MD21.27 U21.19 | length 17.8
  Top Layer w0.254: MD21.27 21.741,37.845 23.774,39.878 28.067,39.878 30.378,37.567 30.378,36.982 31.031,36.33 32.19,36.33 U21.19
GND: C11.2 C12.2 C22.1 C23.2 C26.1 C27.2 J11.2 J11.3 MD21.1 MD21.4 MD21.5 MD21.15 MD21.38 MD21.39 P11.2 P12.4 P13.2 R24.2 R25.1 R26.1 R210.2 R212.1 R213.1 U11.2 U21.2 U21.3 U21.13 U21.18 U21.29 U22.2 U22.3 U22.13 U22.18 U22.29 | length 0
  Top Layer w0.254: MD21.38@7.747,35.544 MD21.38
  other v1: 10,5 15,5 35,5 65,5 7.5,10 12.5,10 17.5,10 22.5,10 27.5,10 32.5,10 37.5,10 52.5,10 57.5,10 62.5,10 67.5,10 5,15 15,15 30,15 35,15 55,15 60,15 65,15 0.5,17 1.5,17 2.5,17 3.5,17 4.5,17 5.5,17 6.5,17 7.508,19.445 12.5,20 17.5,20 22.5,20 27.5,20 37.5,20 57.5,20 62.5,20 67.5,20 7.508,20.445 7.508,21.445 7.508,22.445 7.508,23.445 7.508,24.445 10,25 20,25 55,25 60,25 7.508,25.445 7.508,26.445 7.508,27.445 7.508,28.445 7.508,29.445 12.5,30 17.5,30 22.5,30 27.5,30 47.5,30 57.5,30 62.5,30 67.5,30 7.508,30.445 7.508,31.445 7.508,32.445 51,32.5 32,33 57,33 59,33 61,33 7.508,33.445 32,34 7.508,34.445 65,35 0.5,36.5 1.5,36.5 2.5,36.5 3.5,36.5 4.5,36.5 5.5,36.5 6.5,36.5 56,39 39.5,39.5 7.5,40 17.5,40 22.5,40 49,40 62.5,40 67.5,40 25.5,41.5 30,41.5 5,45 15,45 20,45 25,45 30,45 35,45 40,45 45,45 50,45 55,45 60,45 65,45 7.5,50 12.5,50 17.5,50 22.5,50 27.5,50 32.5,50 37.5,50 42.5,50 47.5,50 52.5,50 57.5,50 62.5,50 67.5,50
NetC21_1: C21.1 U21.6 | length 2.6
  Top Layer w0.254: U21.6 40.872,37.83 41.02,37.979 41.02,38.83 C21.1
NetC23_1: C23.1 U21.8 | length 2.5
  Top Layer w0.254: U21.8 38.457,40.755 38.606,40.904 C23.1
NetC24_1: C24.1 U21.5 | length 4.4
  Top Layer w0.254: U21.5 41.13,37.33 42.318,38.518 42.677,38.518 42.9,38.741 42.9,38.75 C24.1
NetC24_2: C24.2 U21.4 | length 3.8
  Top Layer w0.254: U21.4 43.08,36.83 C24.2
NetC25_1: C25.1 U22.6 | length 2.9
  Top Layer w0.254: U22.6 57.535,37.1 57.683,37.249 C25.1
NetC27_1: C27.1 U22.8 | length 2.5
  Top Layer w0.254: U22.8 54.84,40.032 55.026,40.218 C27.1
NetC28_1: C28.1 U22.5 | length 4.7
  Top Layer w0.254: U22.5 57.784,36.6 59.055,37.871 59.854,37.871 C28.1
NetC28_2: C28.2 U22.4 | length 4.2
  Top Layer w0.254: U22.4 59.81,36.1 C28.2
NetMD21_3: MD21.3 R11.2 | length 1.8
  Top Layer w0.254: R11.2 10.296,18.005 MD21.3
NetMD21_25: MD21.25 P11.1 | length 3
  Top Layer w0.254: MD21.25 24.281,38.48 P11.1
NetMD21_34: MD21.34 P12.2 | length 14.1
  Top Layer w0.254: MD21.34 12.851,37.168 12.857,37.175 12.857,39.777 P12.2
NetMD21_35: MD21.35 P12.3 | length 13.5
  Top Layer w0.254: MD21.35 11.581,36.681 12.4,37.5 12.4,40 17.24,44.84 P12.3
NetR21_2: R21.2 U21.14 | length 2.3
  Top Layer w0.254: R21.2 34.798,39.379 34.947,39.23 U21.14
NetR22_2: R22.2 U21.12 | length 1.7
  Top Layer w0.254: R22.2 36.457,40.919 U21.12
NetR23_2: R23.2 R24.1 U21.17 | length 3.3
  Top Layer w0.254: R24.1 32.644,37.372 32.686,37.33 U21.17
NetR25_2: R25.2 U21.23 | length 2.2
  Top Layer w0.254: R25.2 35.738,32.373 35.738,33.249 35.957,33.468 U21.23
NetR26_2: R26.2 U21.27 | length 1.9
  Top Layer w0.254: R26.2 37.957,32.5 U21.27
NetR27_2: R27.2 U22.14 | length 2.2
  Top Layer w0.254: R27.2 51.181,38.76 51.441,38.5 U22.14
NetR28_2: R28.2 U22.12 | length 1.7
  Top Layer w0.254: R28.2 52.84,40.207 U22.12
NetR29_2: R29.2 R210.1 U22.17 | length 3.3
  Top Layer w0.254: R210.1 48.865,36.585 R29.2 ; R29.2@48.895,36.59 48.9,36.585 48.971,36.585 49.047,36.585 49.055,36.593 50.933,36.593 U22.17
NetR212_2: R212.2 U22.23 | length 2.1
  Top Layer w0.254: R212.2 52.002,31.738 52.002,32.545 52.34,32.884 U22.23
NetR213_2: R213.2 U22.27 | length 1.9
  Top Layer w0.254: U22.27 54.34,31.779 R213.2
OUT1A1: P21.1 U21.24 | length 10.3
  Top Layer w0.254: P21.1 29.972,32.004 30.378,31.598 35.103,31.598 35.109,31.591 36.115,31.591 36.457,31.933 U21.24
OUT1A2: P22.1 U22.24 | length 18.3
  Top Layer w0.254: U22.24 52.84,28.973 53.492,28.322 61.975,28.322 P22.1
OUT1B1: P21.2 U21.21 | length 10
  Top Layer w0.254: P21.2 28.968,31.484 28.968,33.875 30.423,35.33 U21.21
OUT1B2: P22.2 U22.21 | length 27.9
  Top Layer w0.254: U22.21 50.17,34.6 49.809,34.239 49.809,30.759 52.68,27.889 60.376,27.889 64.11,24.155 65.71,24.155 66.192,24.638 66.192,26.645 P22.2
OUT2A1: P21.3 U21.26 | length 12.1
  Top Layer w0.254: P21.3 31.674,29.642 35.981,29.642 36.855,30.516 36.855,32.944 37.457,33.545 U21.26
OUT2A2: P22.3 U22.26 | length 14.1
  Top Layer w0.254: U22.26 53.84,32.407 53.652,32.219 53.652,31.308 53.947,31.013 64.027,31.013 64.56,30.48 P22.3
OUT2B1: P21.4 U21.1 | length 18.3
  Top Layer w0.254: P21.4 31.166,26.594 31.166,28.499 31.928,29.261 36.139,29.261 37.236,30.358 37.236,31.448 37.684,31.896 38.663,31.896 40.488,33.72 40.488,35.001 40.159,35.33 U21.1
OUT2B2: P22.4 U22.1 | length 9.8
  Top Layer w0.254: U22.1 63.317,34.6 P22.4
pads on no net: J11. MD21.6 MD21.7 MD21.13 MD21.14 MD21.16 MD21.17 MD21.18 MD21.19 MD21.20 MD21.21 MD21.22 MD21.23 MD21.24 MD21.26 MD21.29 MD21.32 U21.7 U21.20 U21.25 U22.7 U22.20 U22.25
copper on no net:
  other v2: 4,4 65,4 4,50 65,50

## Polygon pours and split planes (outlines as drawn)
GND on Top Layer "GND_L01_P025" (solid, pour order 25): 0,48.768 0,5.08 ccw(c5.08,5.08) 5.08,0 64.008,0 ccw(c64.008,5.08) 69.088,5.08 69.088,48.768 ccw(c64.008,48.768) 64.008,53.848 5.08,53.848 ccw(c5.08,48.768)
12V_PWR on Top Layer "12V_PWR_L01_P027" (solid, pour order 27): 52.705,12.319 51.435,11.049 51.435,3.175 39.751,3.175 39.751,24.511 52.705,24.511
3V3_PWR on Top Layer "3V3_PWR_L01_P026" (solid, pour order 26): 8.382,19.05 9.652,19.05 9.652,15.494 9.754,15.392 10.947,15.392 10.947,16.891 12.192,16.891 12.192,10.541 8.382,10.541
GND on Bottom Layer "GND_L04_P020" (solid, pour order 20): 0,48.768 0,5.08 ccw(c5.08,5.08) 5.08,0 64.008,0 ccw(c64.008,5.08) 69.088,5.08 69.088,48.768 ccw(c64.008,48.768) 64.008,53.848 5.08,53.848 ccw(c5.08,48.768)
3V3_PWR on PWR (split plane): 54.531,45.057 54.531,38.789 50.696,34.953 46.154,34.953 46.154,41.123 46.144,41.172 46.116,41.214 45.05,42.281 45.008,42.309 44.958,42.319 38.456,42.319 38.406,42.309 38.364,42.281 33.411,37.328 33.383,37.286 33.373,37.236 33.373,14.275 33.383,14.225 33.411,14.183 37.336,10.259 37.336,5.718 36.421,4.803 11.421,4.803 8.613,7.611 8.613,35.024 10.988,37.399 18.532,44.943 18.56,44.985 18.57,45.034 18.57,47.597 19.612,48.639 50.95,48.639
12V_PWR on PWR (split plane): 64.307,53.33 64.605,53.301 64.9,53.252 65.191,53.184 65.478,53.097 65.758,52.992 66.03,52.868 66.294,52.727 66.548,52.569 66.791,52.395 67.022,52.205 67.241,52.001 67.445,51.782 67.635,51.551 67.809,51.308 67.967,51.054 68.108,50.79 68.232,50.518 68.337,50.238 68.424,49.951 68.492,49.66 68.541,49.365 68.57,49.067 68.579,48.786 68.578,48.768 68.578,5.08 68.579,5.062 68.57,4.781 68.541,4.483 68.492,4.188 68.424,3.897 68.337,3.61 68.232,3.33 68.108,3.058 67.967,2.794 67.809,2.54 67.635,2.297 67.445,2.066 67.241,1.847 67.022,1.643 66.791,1.453 66.548,1.279 66.294,1.121 66.03,0.98 65.758,0.856 65.478,0.751 65.191,0.664 64.9,0.596 64.605,0.547 64.307,0.518 64.026,0.509 64.008,0.51 5.08,0.51 5.062,0.509 4.781,0.518 4.483,0.547 4.188,0.596 3.897,0.664 3.61,0.751 3.33,0.856 3.058,0.98 2.794,1.121 2.54,1.279 2.297,1.453 2.066,1.643 1.847,1.847 1.643,2.066 1.453,2.297 1.279,2.54 1.121,2.794 0.98,3.058 0.856,3.33 0.751,3.61 0.664,3.897 0.596,4.188 0.547,4.483 0.518,4.781 0.509,5.062 0.51,5.08 0.51,48.768 0.509,48.786 0.518,49.067 0.547,49.365 0.596,49.66 0.664,49.951 0.751,50.238 0.856,50.518 0.98,50.79 1.121,51.054 1.279,51.308 1.453,51.551 1.643,51.782 1.847,52.001 2.066,52.205 2.297,52.395 2.54,52.569 2.794,52.727 3.058,52.868 3.33,52.992 3.61,53.097 3.897,53.184 4.188,53.252 4.483,53.301 4.781,53.33 5.062,53.339 5.08,53.338 64.008,53.338 64.026,53.339
GND on GND (split plane): 64.307,53.33 64.605,53.301 64.9,53.252 65.191,53.184 65.478,53.097 65.758,52.992 66.03,52.868 66.294,52.727 66.548,52.569 66.791,52.395 67.022,52.205 67.241,52.001 67.445,51.782 67.635,51.551 67.809,51.308 67.967,51.054 68.108,50.79 68.232,50.518 68.337,50.238 68.424,49.951 68.492,49.66 68.541,49.365 68.57,49.067 68.579,48.786 68.578,48.768 68.578,5.08 68.579,5.062 68.57,4.781 68.541,4.483 68.492,4.188 68.424,3.897 68.337,3.61 68.232,3.33 68.108,3.058 67.967,2.794 67.809,2.54 67.635,2.297 67.445,2.066 67.241,1.847 67.022,1.643 66.791,1.453 66.548,1.279 66.294,1.121 66.03,0.98 65.758,0.856 65.478,0.751 65.191,0.664 64.9,0.596 64.605,0.547 64.307,0.518 64.026,0.509 64.008,0.51 5.08,0.51 5.062,0.509 4.781,0.518 4.483,0.547 4.188,0.596 3.897,0.664 3.61,0.751 3.33,0.856 3.058,0.98 2.794,1.121 2.54,1.279 2.297,1.453 2.066,1.643 1.847,1.847 1.643,2.066 1.453,2.297 1.279,2.54 1.121,2.794 0.98,3.058 0.856,3.33 0.751,3.61 0.664,3.897 0.596,4.188 0.547,4.483 0.518,4.781 0.509,5.062 0.51,5.08 0.51,48.768 0.509,48.786 0.518,49.067 0.547,49.365 0.596,49.66 0.664,49.951 0.751,50.238 0.856,50.518 0.98,50.79 1.121,51.054 1.279,51.308 1.453,51.551 1.643,51.782 1.847,52.001 2.066,52.205 2.297,52.395 2.54,52.569 2.794,52.727 3.058,52.868 3.33,52.992 3.61,53.097 3.897,53.184 4.188,53.252 4.483,53.301 4.781,53.33 5.062,53.339 5.08,53.338 64.008,53.338 64.026,53.339

## Other copper
PWR (plane layer: these items are gaps in the copper):
  lines w0.254: 8.484,7.557 11.367,4.674 32.309,4.674 36.474,4.674 37.465,5.664 37.465,10.312 33.503,14.275 33.503,37.236 38.456,42.189 44.958,42.189 46.025,41.123 46.025,34.823 50.749,34.823 54.661,38.735 54.661,45.11 51.003,48.768 19.761,48.768 19.558,48.768 18.44,47.65 18.44,45.034 10.897,37.49 8.484,35.077 8.484,7.557

## Silkscreen, mask and mechanical layers (free items; w line width, h text height)
Top Overlay:
  drawing of 274 lines, arcs and shapes, not listed
  text "ELCO TOSTADOS" at 13.538,11.735 h1.52